# EAGLE board CT_schematic (EAGLE 7.6.0)

Size 100 x 80 mm. Coordinates in mm from the lower left corner, seen from the top.
Outline: 0,0 100,0 100,80 0,80 0,0
Copper layers (1*16): Top 0.035mm / dielectric 1.5mm / Bottom 0.035mm
Design rules "default": minimum track width 10mil, minimum drill 24mil, track to track 8mil, track to pad 8mil, pad to pad 8mil, via to via 8mil, smd to smd 8mil, copper to edge 40mil, drill to drill 8mil, minimum pad ring 10mil, minimum via ring 8mil, stop-mask expansion 4mil, vias tented up to drill 0mil, thermal gap 10mil

## Footprints (pad centres in the part's own frame; a part is rotated, then mirrored left to right if it is on the bottom)
C0603 = smd 0.8 x 0.8: 1 -0.762,0; 2 0.762,0
C0402 = smd 0.5 x 0.5: 1 -0.508,0; 2 0.508,0
C1210 = smd 1.2 x 2.5: 1 -1.524,0; 2 1.524,0
C0805 = smd 1.2 x 1.3: 1 -1.016,0; 2 1.016,0
C1206 = smd 1.3 x 1.6: 1 -1.524,0; 2 1.524,0
R0603 = smd 0.8 x 0.8: 1 -0.762,0; 2 0.762,0
EXV-9H = smd 3.505 x 1.676: 1 -2.857,0; 2 2.857,0
L0603 = smd 0.8 x 0.8: 1 -0.762,0; 2 0.762,0
DR1040 = smd 1.6 x 3.2: 1 -4.458,0; 2 4.458,0
PJ-037B_PACKAGE = drill 3.7 square: 1 12,0 | drill 3.2 square: 2 6,0
LQFP176 = smd 0.3 x 1.2: 1 -10.75,-12.75; 2 -10.25,-12.75; 3 -9.75,-12.75; 4 -9.25,-12.75; 5 -8.75,-12.75; 6 -8.25,-12.75; 7 -7.75,-12.75; 8 -7.25,-12.75; 9 -6.75,-12.75; 10 -6.25,-12.75; 11 -5.75,-12.75; 12 -5.25,-12.75; 13 -4.75,-12.75; 14 -4.25,-12.75; 15 -3.75,-12.75; 16 -3.25,-12.75; 17 -2.75,-12.75; 18 -2.25,-12.75; 19 -1.75,-12.75; 20 -1.25,-12.75; 21 -0.75,-12.75; 22 -0.25,-12.75; 23 0.25,-12.75; 24 0.75,-12.75; 25 1.25,-12.75; 26 1.75,-12.75; 27 2.25,-12.75; 28 2.75,-12.75; 29 3.25,-12.75; 30 3.75,-12.75; 31 4.25,-12.75; 32 4.75,-12.75; 33 5.25,-12.75; 34 5.75,-12.75; 35 6.25,-12.75; 36 6.75,-12.75; 37 7.25,-12.75; 38 7.75,-12.75; 39 8.25,-12.75; 40 8.75,-12.75; 41 9.25,-12.75; 42 9.75,-12.75; 43 10.25,-12.75; 44 10.75,-12.75; 89 10.75,12.75; 90 10.25,12.75; 91 9.75,12.75; 92 9.25,12.75; 93 8.75,12.75; 94 8.25,12.75; 95 7.75,12.75; 96 7.25,12.75; 97 6.75,12.75; 98 6.25,12.75; 99 5.75,12.75; 100 5.25,12.75; 101 4.75,12.75; 102 4.25,12.75; 103 3.75,12.75; 104 3.25,12.75; 105 2.75,12.75; 106 2.25,12.75; 107 1.75,12.75; 108 1.25,12.75; 109 0.75,12.75; 110 0.25,12.75; 111 -0.25,12.75; 112 -0.75,12.75; 113 -1.25,12.75; 114 -1.75,12.75; 115 -2.25,12.75; 116 -2.75,12.75; 117 -3.25,12.75; 118 -3.75,12.75; 119 -4.25,12.75; 120 -4.75,12.75; 121 -5.25,12.75; 122 -5.75,12.75; 123 -6.25,12.75; 124 -6.75,12.75; 125 -7.25,12.75; 126 -7.75,12.75; 127 -8.25,12.75; 128 -8.75,12.75; 129 -9.25,12.75; 130 -9.75,12.75; 131 -10.25,12.75; 132 -10.75,12.75 | smd 1.2 x 0.3: 45 12.75,-10.75; 46 12.75,-10.25; 47 12.75,-9.75; 48 12.75,-9.25; 49 12.75,-8.75; 50 12.75,-8.25; 51 12.75,-7.75; 52 12.75,-7.25; 53 12.75,-6.75; 54 12.75,-6.25; 55 12.75,-5.75; 56 12.75,-5.25; 57 12.75,-4.75; 58 12.75,-4.25; 59 12.75,-3.75; 60 12.75,-3.25; 61 12.75,-2.75; 62 12.75,-2.25; 63 12.75,-1.75; 64 12.75,-1.25; 65 12.75,-0.75; 66 12.75,-0.25; 67 12.75,0.25; 68 12.75,0.75; 69 12.75,1.25; 70 12.75,1.75; 71 12.75,2.25; 72 12.75,2.75; 73 12.75,3.25; 74 12.75,3.75; 75 12.75,4.25; 76 12.75,4.75; 77 12.75,5.25; 78 12.75,5.75; 79 12.75,6.25; 80 12.75,6.75; 81 12.75,7.25; 82 12.75,7.75; 83 12.75,8.25; 84 12.75,8.75; 85 12.75,9.25; 86 12.75,9.75; 87 12.75,10.25; 88 12.75,10.75; 133 -12.75,10.75; 134 -12.75,10.25; 135 -12.75,9.75; 136 -12.75,9.25; 137 -12.75,8.75; 138 -12.75,8.25; 139 -12.75,7.75; 140 -12.75,7.25; 141 -12.75,6.75; 142 -12.75,6.25; 143 -12.75,5.75; 144 -12.75,5.25; 145 -12.75,4.75; 146 -12.75,4.25; 147 -12.75,3.75; 148 -12.75,3.25; 149 -12.75,2.75; 150 -12.75,2.25; 151 -12.75,1.75; 152 -12.75,1.25; 153 -12.75,0.75; 154 -12.75,0.25; 155 -12.75,-0.25; 156 -12.75,-0.75; 157 -12.75,-1.25; 158 -12.75,-1.75; 159 -12.75,-2.25; 160 -12.75,-2.75; 161 -12.75,-3.25; 162 -12.75,-3.75; 163 -12.75,-4.25; 164 -12.75,-4.75; 165 -12.75,-5.25; 166 -12.75,-5.75; 167 -12.75,-6.25; 168 -12.75,-6.75; 169 -12.75,-7.25; 170 -12.75,-7.75; 171 -12.75,-8.25; 172 -12.75,-8.75; 173 -12.75,-9.25; 174 -12.75,-9.75; 175 -12.75,-10.25; 176 -12.75,-10.75
IS61WV102416BLL-10MLI = smd 0.4 x 0.4: A1 0,0; A2 0.75,0; A3 1.5,0; A4 2.25,0; A5 3,0; A6 3.75,0; B1 0,-0.75; B2 0.75,-0.75; B3 1.5,-0.75; B4 2.25,-0.75; B5 3,-0.75; B6 3.75,-0.75; C1 0,-1.5; C2 0.75,-1.5; C3 1.5,-1.5; C4 2.25,-1.5; C5 3,-1.5; C6 3.75,-1.5; D1 0,-2.25; D2 0.75,-2.25; D3 1.5,-2.25; D4 2.25,-2.25; D5 3,-2.25; D6 3.75,-2.25; E1 0,-3; E2 0.75,-3; E3 1.5,-3; E4 2.25,-3; E5 3,-3; E6 3.75,-3; F1 0,-3.75; F2 0.75,-3.75; F3 1.5,-3.75; F4 2.25,-3.75; F5 3,-3.75; F6 3.75,-3.75; G1 0,-4.5; G2 0.75,-4.5; G3 1.5,-4.5; G4 2.25,-4.5; G5 3,-4.5; G6 3.75,-4.5; H1 0,-5.25; H2 0.75,-5.25; H3 1.5,-5.25; H4 2.25,-5.25; H5 3,-5.25; H6 3.75,-5.25
SOIC-8 = smd 1.6 x 0.6: 1 -2.7,1.905 | smd 1.55 x 0.6: 2 -2.7,0.635; 3 -2.7,-0.635; 4 -2.7,-1.905; 5 2.7,-1.905; 6 2.7,-0.635; 7 2.7,0.635; 8 2.7,1.905
RHB32_3P45X3P45 = smd 0.85 x 0.28: 1 -2.475,1.75; 2 -2.475,1.25; 3 -2.475,0.75; 4 -2.475,0.25; 5 -2.475,-0.25; 6 -2.475,-0.75; 7 -2.475,-1.25; 8 -2.475,-1.75; 17 2.475,-1.75; 18 2.475,-1.25; 19 2.475,-0.75; 20 2.475,-0.25; 21 2.475,0.25; 22 2.475,0.75; 23 2.475,1.25; 24 2.475,1.75 | smd 0.28 x 0.85: 9 -1.75,-2.475; 10 -1.25,-2.475; 11 -0.75,-2.475; 12 -0.25,-2.475; 13 0.25,-2.475; 14 0.75,-2.475; 15 1.25,-2.475; 16 1.75,-2.475; 25 1.75,2.475; 26 1.25,2.475; 27 0.75,2.475; 28 0.25,2.475; 29 -0.25,2.475; 30 -0.75,2.475; 31 -1.25,2.475; 32 -1.75,2.475 | smd 3.45 x 3.45: 33 0,0
MICRO_USB_AB = smd 0.4 x 1.35: 1 1.3,0.26; 2 0.65,0.26; 3 0,0.26; 4 -0.65,0.26; 5 -1.3,0.26 | drill 0.6 pad 0.95 long: 6 4.175,-2.54; 7 -4.175,-2.54 | drill 0.7 pad 1.1 long: 8 -2.225,0.46; 9 2.225,0.46
SOT143B = smd 1 x 0.7: 1 -0.75,-1 | smd 0.6 x 0.7: 2 0.95,-1; 3 0.95,1; 4 -0.95,1
SOT-23-6 = smd 1.1 x 0.6: 1 -1.4,0.95; 2 -1.4,0; 3 -1.4,-0.95; 4 1.4,-0.95; 5 1.4,0; 6 1.4,0.95
ABLS-25.000MHZ-B2F-T = smd 5.6 x 2.8: 1 -3.81,0; 2 5.69,0
ASEK = smd 1.4 x 1: 1 -1.1,-0.8; 2 1.1,-0.8; 3 1.1,0.8; 4 -1.1,0.8
ASFL1 = smd 1.7 x 1.5: 1 -1.27,-1.1; 2 1.27,-1.1; 3 1.27,1.1; 4 -1.27,1.1
WSON-8 = smd 0.3 x 0.6: 1 -0.75,0; 2 0.05,0; 3 0.85,0; 4 1.65,0; 5 1.65,3.8; 6 0.85,3.8; 7 0.05,3.8; 8 -0.75,3.8 | smd 3 x 2.6: PAD 0.45,1.9
HTSSOP14 = smd 1.676 x 0.356: 1 -2.8,1.95; 2 -2.8,1.3; 3 -2.8,0.65; 4 -2.8,0; 5 -2.8,-0.65; 6 -2.8,-1.3; 7 -2.8,-1.95; 8 2.8,-1.95; 9 2.8,-1.3; 10 2.8,-0.65; 11 2.8,0; 12 2.8,0.65; 13 2.8,1.3; 14 2.8,1.95 | smd 3 x 5: 15 0,0 | drill 0.4 pad 0.45: P$1 -0.75,1.5; P$2 0.75,1.5; P$3 -0.75,0; P$4 0.8,0; P$5 -0.75,-1.5; P$6 0.9,-1.5
QFN-38_UHF = smd 0.75 x 0.3: 1 -2.4,2.75; 2 -2.4,2.25; 3 -2.4,1.75; 4 -2.4,1.25; 6 -2.4,0.25; 7 -2.4,-0.25; 8 -2.4,-0.75; 9 -2.4,-1.25; 10 -2.4,-1.75; 11 -2.4,-2.25; 12 -2.4,-2.75; 20 2.4,-2.75; 21 2.4,-2.25; 22 2.4,-1.75; 23 2.4,-1.25; 24 2.4,-0.75; 25 2.4,-0.25; 26 2.4,0.25; 27 2.4,0.75; 28 2.4,1.25; 29 2.4,1.75; 30 2.4,2.25; 31 2.4,2.75 | smd 0.758 x 0.3: 5 -2.4,0.75 | smd 0.3 x 0.75: 13 -1.5,-3.4; 14 -1,-3.4; 15 -0.5,-3.4; 16 0,-3.4; 17 0.5,-3.4; 18 1,-3.4; 19 1.5,-3.4; 32 1.5,3.4; 33 1,3.4; 34 0.5,3.4; 35 0,3.4; 36 -0.5,3.4; 37 -1,3.4; 38 -1.5,3.4 | smd 3.2 x 5.2: 39 0,0
IRF8306MTRPBF = smd 0.9 x 1.85: 1 0,0; 2 0,-2.35; 6 6.4,0; 7 6.4,-2.35 | smd 0.75 x 0.75: 3 1.75,-1.175 | smd 1.45 x 0.87: 4 3.5,-0.565; 5 3.5,-1.785
SW_4-1437565-2 = smd 1.4 x 2.1: 1 -2.23,4.55; 2 -2.23,-4.55; 3 2.23,4.55; 4 2.23,-4.55
LGM67K-G1J2-24-Z = smd 0.8 x 1.4: A -2,0; C 0,0
NC7SZ125M5X = smd 1.3 x 0.7: 1 -1.3,0.95; 2 -1.3,0; 3 -1.3,-0.95; 4 1.3,-0.95; 5 1.3,0.95

## Placement (x,y rotation side)
C1  1e-06  [C0603]  -38.1,86.36 0 top  (outside the outline)
C2  1e-07  [C0603]  -41.91,86.36 0 top  (outside the outline)
C3  1e-07  [C0603]  -45.72,86.36 0 top  (outside the outline)
C4  1e-07  [C0603]  -49.53,86.36 0 top  (outside the outline)
C5  1e-07  [C0603]  -53.34,86.36 0 top  (outside the outline)
C6  1e-07  [C0603]  -57.15,86.36 0 top  (outside the outline)
C7  1e-07  [C0603]  -60.96,86.36 0 top  (outside the outline)
C8  1e-07  [C0603]  -64.77,86.36 0 top  (outside the outline)
C9  1e-07  [C0603]  -68.58,86.36 0 top  (outside the outline)
C10  1e-07  [C0603]  -72.39,86.36 0 top  (outside the outline)
C11  1e-07  [C0603]  -76.2,86.36 0 top  (outside the outline)
C12  1e-07  [C0603]  -80.01,86.36 0 top  (outside the outline)
C13  1e-07  [C0603]  -83.82,86.36 0 top  (outside the outline)
C14  1e-07  [C0603]  -87.63,86.36 0 top  (outside the outline)
C15  1e-07  [C0603]  -15.24,91.44 0 top  (outside the outline)
C16  1e-07  [C0603]  -19.05,91.44 0 top  (outside the outline)
C17  1e-07  [C0603]  -22.86,91.44 0 top  (outside the outline)
C18  4.7e-06  [C0603]  -19.05,86.36 0 top  (outside the outline)
C19  1e-08  [C0603]  -26.67,91.44 0 top  (outside the outline)
C20  1e-06  [C0603]  -30.48,91.44 0 top  (outside the outline)
C21  1e-07  [C0603]  -34.29,91.44 0 top  (outside the outline)
C22  1e-07  [C0603]  -38.1,91.44 0 top  (outside the outline)
C23  1e-07  [C0603]  -41.91,91.44 0 top  (outside the outline)
C24  1e-11  [C0402]  -31.75,96.52 0 top  (outside the outline)
C25  1e-11  [C0402]  -35.56,96.52 0 top  (outside the outline)
C26  1e-07  [C0402]  -39.37,96.52 0 top  (outside the outline)
C27  2.2e-06  [C0603]  -22.86,86.36 0 top  (outside the outline)
C28  1e-08  [C0402]  -43.18,96.52 0 top  (outside the outline)
C29  1e-07  [C0402]  -46.99,96.52 0 top  (outside the outline)
C30  2.2e-06  [C0603]  -26.67,86.36 0 top  (outside the outline)
C31  1e-07  [C0402]  -50.8,96.52 0 top  (outside the outline)
C32  1e-07  [C0402]  -54.61,96.52 0 top  (outside the outline)
C33  2.2e-06  [C0603]  -30.48,86.36 0 top  (outside the outline)
C34  1e-06  [C0603]  -45.72,91.44 0 top  (outside the outline)
C35  1e-08  [C0402]  -58.42,96.52 0 top  (outside the outline)
C36  1e-08  [C0402]  -62.23,96.52 0 top  (outside the outline)
C37  1e-08  [C0402]  -66.04,96.52 0 top  (outside the outline)
C38  1e-05  [C1210]  -67.31,62.23 0 top  (outside the outline)
C39  1e-05  [C0805]  -64.77,69.85 0 top  (outside the outline)
C40  1e-06  [C0603]  -49.53,91.44 0 top  (outside the outline)
C41  3.3e-09  [C0402]  -27.94,96.52 0 top  (outside the outline)
C42  1e-07  [C0402]  -69.85,96.52 0 top  (outside the outline)
C43  2.2e-05  [C1210]  -73.66,62.23 0 top  (outside the outline)
C44  2.2e-05  [C1210]  -80.01,62.23 0 top  (outside the outline)
C45  1e-05  [C1206]  -35.56,69.85 0 top  (outside the outline)
C46  1e-05  [C1206]  -41.91,69.85 0 top  (outside the outline)
C47  8e-07  [R0603]  -53.34,91.44 0 top  (outside the outline)
C48  1e-05  [C1210]  -86.36,62.23 0 top  (outside the outline)
C49  1e-08  [C0402]  -73.66,96.52 0 top  (outside the outline)
C50  1e-05  [C1210]  -16.51,69.85 0 top  (outside the outline)
C51  1e-05  [C1210]  -22.86,69.85 0 top  (outside the outline)
C52  1e-08  [C0402]  -77.47,96.52 0 top  (outside the outline)
C53  1e-05  [C1210]  -29.21,69.85 0 top  (outside the outline)
C54  1e-05  [C0805]  -69.85,69.85 0 top  (outside the outline)
C55  1e-07  [C0402]  -81.28,96.52 0 top  (outside the outline)
C56  2.2e-06  [C0603]  -34.29,86.36 0 top  (outside the outline)
C57  2.45e-08  [R0603]  -52.07,76.2 0 top  (outside the outline)
C58  2.8258362168397e-09  [R0603]  -80.01,69.85 0 top  (outside the outline)
C59  7.105e-09  [R0603]  -16.51,76.2 0 top  (outside the outline)
C60  0.0001  [EXV-9H]  -64.77,53.34 0 top  (outside the outline)
C61  0.0001  [EXV-9H]  -76.2,53.34 0 top  (outside the outline)
C62  1e-08  [C0402]  -85.09,96.52 0 top  (outside the outline)
C63  1e-08  [C0402]  -88.9,96.52 0 top  (outside the outline)
F1  240.0  [L0603]  -57.15,91.44 0 top  (outside the outline)
I1  5.2e-06  [DR1040]  -29.21,33.02 0 top  (outside the outline)
J1  PJ-037B  [PJ-037B_PACKAGE]  -54.61,7.62 0 top  (outside the outline)
R2  1000.0  [R0603]  -60.96,91.44 0 top  (outside the outline)
R7  4700.0  [R0603]  -64.77,91.44 0 top  (outside the outline)
R8  4700.0  [R0603]  -68.58,91.44 0 top  (outside the outline)
R9  2200.0  [R0603]  -72.39,91.44 0 top  (outside the outline)
R11  2200.0  [R0603]  -76.2,91.44 0 top  (outside the outline)
R13  10000.0  [R0603]  -57.15,76.2 0 top  (outside the outline)
R14  10000.0  [R0603]  -62.23,76.2 0 top  (outside the outline)
R15  10000.0  [R0603]  -67.31,76.2 0 top  (outside the outline)
R16  10000.0  [R0603]  -72.39,76.2 0 top  (outside the outline)
R17  10000.0  [R0603]  -77.47,76.2 0 top  (outside the outline)
R18  10000.0  [R0603]  -82.55,76.2 0 top  (outside the outline)
R19  10000.0  [R0603]  -87.63,76.2 0 top  (outside the outline)
R20  10000.0  [R0603]  -15.24,81.28 0 top  (outside the outline)
R21  10000.0  [R0603]  -20.32,81.28 0 top  (outside the outline)
R22  47000.0  [R0603]  -25.4,81.28 0 top  (outside the outline)
R23  10000.0  [R0603]  -30.48,81.28 0 top  (outside the outline)
R24  10000.0  [R0603]  -35.56,81.28 0 top  (outside the outline)
R25  100000.0  [R0603]  -21.59,76.2 0 top  (outside the outline)
R26  200.0  [R0603]  -80.01,91.44 0 top  (outside the outline)
R27  1000.0  [R0603]  -83.82,91.44 0 top  (outside the outline)
R28  30000.0  [R0603]  -40.64,81.28 0 top  (outside the outline)
R29  22000.0  [R0603]  -45.72,81.28 0 top  (outside the outline)
R30  100000.0  [R0603]  -26.67,76.2 0 top  (outside the outline)
R31  153694.38  [R0603]  -85.09,69.85 0 top  (outside the outline)
R32  100000.0  [R0603]  -31.75,76.2 0 top  (outside the outline)
R33  100000.0  [R0603]  -36.83,76.2 0 top  (outside the outline)
R34  3900.0  [R0603]  -87.63,91.44 0 top  (outside the outline)
R35  1000.0  [R0603]  -15.24,96.52 0 top  (outside the outline)
R36  100000.0  [R0603]  -41.91,76.2 0 top  (outside the outline)
R37  200.0  [R0603]  -19.05,96.52 0 top  (outside the outline)
R38  1000.0  [R0603]  -22.86,96.52 0 top  (outside the outline)
R39  10000.0  [R0603]  -50.8,81.28 0 top  (outside the outline)
R40  75000.0  [R0603]  -55.88,81.28 0 top  (outside the outline)
R41  10000.0  [R0603]  -60.96,81.28 0 top  (outside the outline)
R42  10000.0  [R0603]  -66.04,81.28 0 top  (outside the outline)
R43  95300.0  [R0603]  -71.12,81.28 0 top  (outside the outline)
R44  95300.0  [R0603]  -76.2,81.28 0 top  (outside the outline)
R45  10000.0  [R0603]  -81.28,81.28 0 top  (outside the outline)
R46  10000.0  [R0603]  -86.36,81.28 0 top  (outside the outline)
R47  10000.0  [R0603]  -15.24,86.36 0 top  (outside the outline)
R48  120000.0  [R0603]  -46.99,76.2 0 top  (outside the outline)
U1  STM32F746IET6  [LQFP176]  -26.67,13.97 0 top  (outside the outline)
U2  IS61WV102416BLL-10MLI  [IS61WV102416BLL-10MLI]  -20.32,36.83 0 top  (outside the outline)
U3  24AA1025T-I/SN  [SOIC-8]  -45.72,33.02 0 top  (outside the outline)
U4  TUSB1210BRHBR  [RHB32_3P45X3P45]  -38.1,63.5 0 top  (outside the outline)
U5  47590-0001  [MICRO_USB_AB]  -63.5,7.62 0 top  (outside the outline)
U6  prtr5v0u2ax  [SOT143B]  -24.13,101.6 0 top  (outside the outline)
U7  MAX4995AAUT+T  [SOT-23-6]  -46.99,68.58 0 top  (outside the outline)
U8  ABLS-25.000MHZ-B2F-T  [ABLS-25.000MHZ-B2F-T]  -26.67,63.5 0 top  (outside the outline)
U9  ASEK-32.768KHz-ECST  [ASEK]  -55.88,53.34 0 top  (outside the outline)
U10  ASFL1-26MHZ-NCS  [ASFL1]  -26.67,54.61 0 top  (outside the outline)
U11  LP3878SDX-ADJ/NOPB  [WSON-8]  -30.48,43.18 0 top  (outside the outline)
U12  tps54225PWP  [HTSSOP14]  -46.99,62.23 0 top  (outside the outline)
U13  LP2951ACSDX/NOPB  [WSON-8]  -88.9,43.18 0 top  (outside the outline)
U14  LP3878SDX-ADJ/NOPB  [WSON-8]  -50.8,43.18 0 top  (outside the outline)
U15  LP3878SDX-ADJ/NOPB  [WSON-8]  -71.12,43.18 0 top  (outside the outline)
U16  LTC2928CUHF#PBF  [QFN-38_UHF]  -34.29,53.34 0 top  (outside the outline)
U17  IRF8306MTRPbF  [IRF8306MTRPBF]  -63.5,34.29 0 top  (outside the outline)
U18  IRF8306MTRPbF  [IRF8306MTRPBF]  -78.74,34.29 0 top  (outside the outline)
U19  4-1437565-2  [SW_4-1437565-2]  -83.82,6.35 0 top  (outside the outline)
U20  Q65110A2395  [LGM67K-G1J2-24-Z]  -55.88,62.23 0 top  (outside the outline)
U21  nc7sz125m5x  [NC7SZ125M5X]  -52.07,69.85 0 top  (outside the outline)
U22  nc7sz125m5x  [NC7SZ125M5X]  -58.42,69.85 0 top  (outside the outline)

## Library data of the parts
C1-C63 F1 I1 J1 R2 R7-R9 R11 R13-R48 U1-U22 = circuit_tree

## Nets
CLK_CRYSTAL_U1_29: C24.1 U1.29 U8.1
CLK_CRYSTAL_U1_30: C25.1 U1.30 U8.2
CLK_U1_9: U1.9 U9.3
CLK_U4_1: U4.1 U10.3
GND: C1.2 C2.2 C3.2 C4.2 C5.2 C6.2 C7.2 C8.2 C9.2 C10.2 C11.2 C12.2 C13.2 C14.2 C15.2 C16.2 C17.2 C18.2 C19.2 C20.2 C21.2 C22.2 C23.2 C24.2 C25.2 C26.2 C27.2 C28.2 C29.2 C30.2 C31.2 C32.2 C33.2 C34.2 C35.2 C36.2 C37.2 C38.2 C39.2 C40.2 C41.2 C43.2 C44.2 C45.2 C46.2 C47.2 C48.2 C49.2 C50.2 C51.2 C52.2 C53.2 C54.2 C55.2 C56.2 C57.2 C58.2 C59.2 C60.2 C61.2 C62.2 C63.2 J1.2 R2.2 R13.2 R21.2 R22.2 R27.2 R29.2 R32.2 R35.2 R38.2 R40.2 R43.2 R44.2 R45.2 R46.2 R47.2 U1.14 U1.22 U1.37 U1.61 U1.71 U1.90 U1.102 U1.113 U1.126 U1.135 U1.148 U1.158 U2.D1 U2.E6 U3.4 U3.7 U4.33 U5.5 U5.6 U5.7 U5.8 U5.9 U6.1 U7.2 U9.2 U10.2 U11.3 U11.PAD U12.5 U12.8 U12.9 U12.15 U13.3 U13.4 U13.PAD U14.3 U14.PAD U15.3 U15.PAD U16.8 U16.9 U16.10 U16.12 U16.13 U16.24 U16.25 U16.30 U16.32 U16.39 U20.C U21.1 U21.3 U22.1 U22.3
NET_U1_31: R7.1 U1.31 U21.4
NET_U1_39: C19.1 C20.1 F1.1 U1.38 U1.39
NET_U1_48: R15.1 U1.48
NET_U1_125: C23.1 U1.125
NET_U1_164: R9.1 U1.164 U3.6
NET_U1_165: R11.1 U1.165 U3.5
NET_U1_166: R13.1 U1.166
NET_U1_171: R14.1 U1.171
NET_U1_175: U20.A
NET_U1_176: U19.3 U19.4
NET_U2_A2: R17.1 U2.A2
NET_U2_B5: R16.1 U2.B5
NET_U2_G5: R18.1 U2.G5
NET_U3_1: R20.1 U3.1
NET_U3_2: R21.1 U3.2
NET_U3_3: R19.1 U3.3
NET_U4_11: R23.1 U4.11
NET_U4_12: C33.1 U4.12
NET_U4_14: R24.1 U4.14
NET_U4_20: C30.1 U4.20
NET_U4_27: R8.1 U4.27 U22.4
NET_U5_1: C34.1 U4.22 U5.1 U6.4 U7.1
NET_U5_2: U4.19 U5.2 U6.3
NET_U5_3: U4.18 U5.3 U6.2
NET_U5_4: U4.23 U5.4
NET_U7_3: R22.1 U7.3
NET_U7_4: U4.17 U7.4
NET_U11_1: C37.1 U11.1
NET_U11_6: R26.2 R27.1 U11.6
NET_U11_8: R25.1 U11.8
NET_U12_2: R28.2 R29.1 U12.2
NET_U12_3: C40.1 U12.3
NET_U12_4: C41.1 U12.4
NET_U12_10: C42.1 I1.1 U12.10 U12.11
NET_U12_12: C42.2 U12.12
NET_U13_5: R30.1 U13.5
NET_U13_7: R31.2 R32.1 U13.7
NET_U14_1: C49.1 U14.1
NET_U14_6: R34.2 R35.1 U14.6
NET_U14_8: R33.1 U14.8
NET_U15_1: C52.1 U15.1
NET_U15_6: R37.2 R38.1 U15.6
NET_U15_8: R36.1 U15.8
NET_U16_3: R46.1 U16.3
NET_U16_6: R43.1 U16.6
NET_U16_7: R44.1 U16.7
NET_U16_16: R45.1 R48.1 U16.16
NET_U16_18: R42.1 U16.18
NET_U16_19: R41.1 U16.19 U16.20
NET_U16_21: R39.1 R40.1 U16.21 U21.2 U22.2
NET_U16_22: C55.1 R39.2 R41.2 R42.2 U16.11 U16.22
NET_U16_26: C58.1 U16.26
NET_U16_27: C57.1 U16.27
NET_U16_28: C59.1 U16.28
NET_U16_38: R47.1 U16.38
NET_U17_3: U16.2 U17.3
NET_U18_3: U16.37 U18.3
NET_U19_1: R2.1 U19.1 U19.2
PROC_USB_OTG_HS_ULPI_CK: U4.26
PROC_USB_OTG_HS_ULPI_D0: U4.3
PROC_USB_OTG_HS_ULPI_D1: U4.4
PROC_USB_OTG_HS_ULPI_D2: U4.5
PROC_USB_OTG_HS_ULPI_D3: U4.6
PROC_USB_OTG_HS_ULPI_D4: U4.7
PROC_USB_OTG_HS_ULPI_D5: U4.9
PROC_USB_OTG_HS_ULPI_D6: U4.10
PROC_USB_OTG_HS_ULPI_D7: U4.13
PROC_USB_OTG_HS_ULPI_DIR: U4.31
PROC_USB_OTG_HS_ULPI_NXT: U4.2
PROC_USB_OTG_HS_ULPI_STP: U4.29
VCC_14V5: C56.1 C60.1 C61.1 J1.1 R48.2 U16.23 U17.1 U17.2 U17.6 U17.7 U18.1 U18.2 U18.6 U18.7
VCC_S1_14V5: C38.1 C45.1 C46.1 C47.1 C50.1 R25.2 R33.2 U11.4 U12.7 U12.13 U12.14 U13.8 U14.4 U17.4 U17.5
VCC_S2_14V5: C53.1 R36.2 U15.4 U18.4 U18.5
VCC_TIER1_1V2: C22.1 C39.1 R26.1 U1.81 U11.5
VCC_TIER1_1V8: C1.1 C2.1 C3.1 C4.1 C5.1 C6.1 C7.1 C8.1 C9.1 C10.1 C11.1 C12.1 C13.1 C14.1 C15.1 C16.1 C17.1 C18.1 C28.1 C31.1 C32.1 C43.1 C44.1 C62.1 C63.1 F1.2 I1.2 R7.2 R8.2 R9.2 R11.2 R14.2 R15.2 R19.2 R20.2 R23.2 R24.2 R28.1 U1.6 U1.15 U1.23 U1.36 U1.49 U1.62 U1.72 U1.82 U1.91 U1.103 U1.127 U1.136 U1.149 U1.159 U1.172 U3.8 U4.28 U4.30 U4.32 U12.1 U21.5 U22.5
VCC_TIER1_3V3: C21.1 C26.1 C27.1 C29.1 C35.1 C36.1 C48.1 R16.2 R17.2 R18.2 R30.2 R31.1 U1.114 U2.D6 U2.E1 U4.21 U9.4 U10.4 U13.1
VCC_TIER1_5V0: C51.1 R34.1 U7.5 U14.5
VCC_TIER2_1V2: C54.1 R37.1 U15.5

## Tracks (layer width: path | path; a pad name or v marks a point on that pad's centre or on a via)
CLK_CRYSTAL_U1_29  (2 unrouted)
CLK_CRYSTAL_U1_30  (2 unrouted)
CLK_U1_9  (1 unrouted)
CLK_U4_1  (1 unrouted)
GND  (131 unrouted)
NET_U1_31  (2 unrouted)
NET_U1_39  (4 unrouted)
NET_U1_48  (1 unrouted)
NET_U1_125  (1 unrouted)
NET_U1_164  (2 unrouted)
NET_U1_165  (2 unrouted)
NET_U1_166  (1 unrouted)
NET_U1_171  (1 unrouted)
NET_U1_176  (1 unrouted)
NET_U2_A2  (1 unrouted)
NET_U2_B5  (1 unrouted)
NET_U2_G5  (1 unrouted)
NET_U3_1  (1 unrouted)
NET_U3_2  (1 unrouted)
NET_U3_3  (1 unrouted)
NET_U4_11  (1 unrouted)
NET_U4_12  (1 unrouted)
NET_U4_14  (1 unrouted)
NET_U4_20  (1 unrouted)
NET_U4_27  (2 unrouted)
NET_U5_1  (4 unrouted)
NET_U5_2  (2 unrouted)
NET_U5_3  (2 unrouted)
NET_U5_4  (1 unrouted)
NET_U7_3  (1 unrouted)
NET_U7_4  (1 unrouted)
NET_U11_1  (1 unrouted)
NET_U11_6  (2 unrouted)
NET_U11_8  (1 unrouted)
NET_U12_2  (2 unrouted)
NET_U12_3  (1 unrouted)
NET_U12_4  (1 unrouted)
NET_U12_10  (3 unrouted)
NET_U12_12  (1 unrouted)
NET_U13_5  (1 unrouted)
NET_U13_7  (2 unrouted)
NET_U14_1  (1 unrouted)
NET_U14_6  (2 unrouted)
NET_U14_8  (1 unrouted)
NET_U15_1  (1 unrouted)
NET_U15_6  (2 unrouted)
NET_U15_8  (1 unrouted)
NET_U16_3  (1 unrouted)
NET_U16_6  (1 unrouted)
NET_U16_7  (1 unrouted)
NET_U16_16  (2 unrouted)
NET_U16_18  (1 unrouted)
NET_U16_19  (2 unrouted)
NET_U16_21  (4 unrouted)
NET_U16_22  (5 unrouted)
NET_U16_26  (1 unrouted)
NET_U16_27  (1 unrouted)
NET_U16_28  (1 unrouted)
NET_U16_38  (1 unrouted)
NET_U17_3  (1 unrouted)
NET_U18_3  (1 unrouted)
NET_U19_1  (2 unrouted)
VCC_14V5  (13 unrouted)
VCC_S1_14V5  (14 unrouted)
VCC_S2_14V5  (4 unrouted)
VCC_TIER1_1V2  (4 unrouted)
VCC_TIER1_1V8  (59 unrouted)
VCC_TIER1_3V3  (18 unrouted)
VCC_TIER1_5V0  (3 unrouted)
VCC_TIER2_1V2  (2 unrouted)